# Altium PCB Olimex interface board.PcbDoc (part 2 of 2)
Units mm, origin at the board's own origin, x right, y up, seen from the top; angles counter-clockwise.
Board outline 96.01 x 73.71 mm, 4 copper layers (Component Side, Ground Plane, Power Plane, Solder Side), stack 0.98 mm thick; 92 components, 62 nets, 646 pads, 104 vias.
Unrouted connection lines stored in the file: 1.
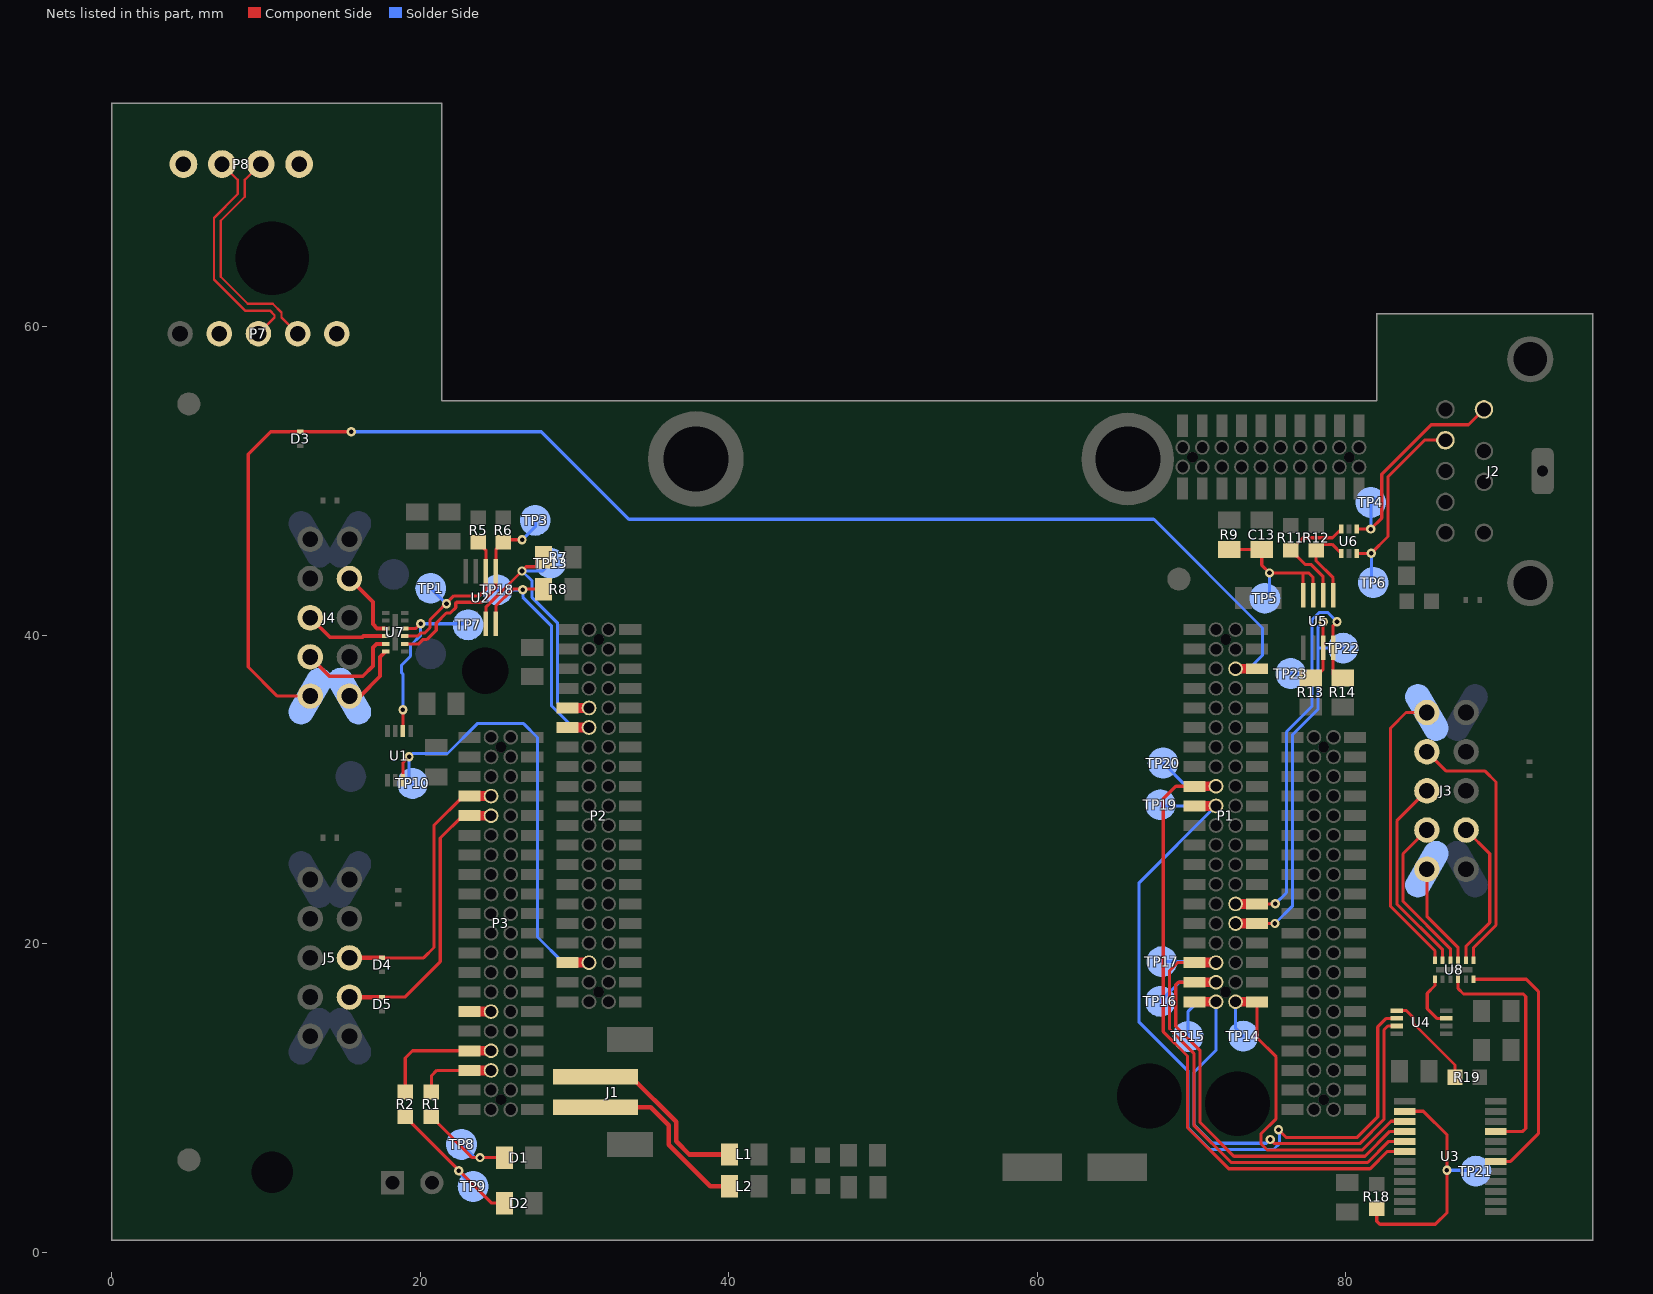
[diagram p4: the nets of this part, all layers, seen from the top]

## Via types
v1: diameter 0.6, hole 0.3, Component Side to Solder Side, 63 vias
v2: diameter 0.6, hole 0.3, Component Side to Solder Side, tented both sides, 38 vias
v3: diameter 1, hole 0.5, Component Side to Solder Side, tented both sides, 2 vias
v4: diameter 1, hole 0.5, Component Side to Solder Side, 1 vias

## Nets (pads, with @x,y where several pads share a name; then routed paths per layer and width w, separated by ;. In a path a pad name is that pad's centre, name@x,y a point inside that pad or via, vN(x,y) a via of type N, cw(c..) or ccw(c..) an arc to the next point about the centre after c; other vN are vias at no path point) (continued)
NetC13_2: C13.2 R9.1 TP5.1 U5.7 U5.8 | length 10.7
  Component Side w0.203: R9.1@72.45,45.575 C13.2@74.55,45.575 74.55,44.55 v2(75.05,44.05) 77.575,44.05 77.875,43.75 U5.7@77.875,42.6 ; U5.8@77.225,42.6 77.225,44.05
  Solder Side w0.203: TP5.1@75.05,42.7 v2(75.05,44.05)
NetD1_1: D1.1 R1.1 TP8.1 | length 7.4
  Component Side w0.203: R1.1@20.725,8.8 23.375,6.15 D1.1@25.45,6.15
  Solder Side w0.203: TP8.1@22.675,7 23.525,6.15 v2(23.875,6.15)
NetD2_1: D2.1 R2.1 TP9.1 | length 10.2
  Component Side w0.203: R2.1@19.025,8.8 24.625,3.2 D2.1@25.461,3.2
  Solder Side w0.203: v2(22.5,5.3) 22.5,5.2 TP9.1@23.425,4.275
NetJ1_1: J1.1 L1.2 | length 11.5
  Component Side w0.3: J1.1@31.35,11.4 33.662,11.4 36.6,8.462 36.6,7.2 37.45,6.35 L1.2@40.05,6.35
NetJ1_2: J1.2 L2.2 | length 11.2
  Component Side w0.3: J1.2@31.35,9.4 34.95,9.4 36.097,8.253 36.097,6.992 38.788,4.3 L2.2@39.688,4.3
NetJ3_1: J3.1 U8.12 | length 19
  Component Side w0.2: J3.1@85.25,35 83.9,35 82.9,34 82.9,22.425 85.775,19.55 U8.12@85.775,18.939
NetJ3_3: J3.3 U8.7 | length 17.5
  Component Side w0.2: J3.3@85.25,32.46 86.51,31.2 89.025,31.2 89.725,30.5 89.725,26.018 89.728,26.015 89.728,21.214 88.275,19.761 U8.7@88.275,18.939
NetJ3_5: J3.5 U8.11 | length 13
  Component Side w0.2: J3.5@85.25,29.92 83.303,27.973 83.303,22.592 86.275,19.62 U8.11@86.275,18.939
NetJ3_7: J3.7 U8.10 | length 10.4
  Component Side w0.2: J3.7@85.25,27.38 83.706,25.836 83.706,22.759 86.775,19.69 U8.10@86.775,18.939
NetJ3_8: J3.8 U8.8 | length 9.7
  Component Side w0.2: U8.8@87.775,18.939 87.775,19.831 89.325,21.381 89.325,25.845 J3.8@87.79,27.38
NetJ3_9: J3.9 U8.9 | length 6.7
  Component Side w0.2: J3.9@85.25,24.84 85.25,21.786 87.275,19.761 U8.9@87.275,18.939
NetJ4_1: J4.1 U7.12 | length 4.3
  Component Side w0.254: J4.1@15.408,36.064 16.114,36.064 17.4,37.35 17.4,38.589 U7.12@17.761,38.95
NetJ4_4: J4.4 U7.11 | length 7
  Component Side w0.254: J4.4@12.868,38.604 14.122,37.35 16.275,37.35 16.943,38.018 16.943,39.218 17.175,39.45 U7.11@17.761,39.45
NetJ4_6: J4.6 U7.10 | length 5.4
  Component Side w0.254: J4.6@12.868,41.144 14.137,39.875 16.25,39.875 16.325,39.95 U7.10@17.761,39.95
NetJ4_7: J4.7 U7.9 | length 4.5
  Component Side w0.254: J4.7@15.408,43.684 16.925,42.167 16.925,40.725 17.2,40.45 U7.9@17.761,40.45
NetR11_1: R11.1 U5.6 U6.6 | length 7.9
  Component Side w0.2: U5.6@78.525,42.6 78.525,43.805 77.73,44.6 77.35,44.6 R11.1@76.425,45.525 77.225,46.325 79.135,46.325 U6.6@79.7,46.89
NetR12_1: R12.1 U5.5 U6.1 | length 5.4
  Component Side w0.2: U5.5@79.175,42.6 79.175,43.725 78.075,44.825 R12.1@78.075,45.525 78.45,45.9 79.11,45.9 U6.1@79.7,45.31
NetR18_2: R18.2 TP21.1 U3.2 | length 16.1
  Component Side w0.203: R18.2@82,2.825 82,2.025 82.2,1.825 85.8,1.825 86.561,2.586 86.561,7.614 85.025,9.15 U3.2@83.825,9.15
  Solder Side w0.203: v1(86.55,5.325) 88.375,5.325 TP21.1@88.425,5.275
NetR19_2: R19.2 U4.5 | length 6.3
  Component Side w0.203: U4.5@83.3,15.675 83.925,15.675 84.35,15.25 84.35,14.875 87.075,12.15 R19.2@87.075,11.35
NRESET: U3.21 U8.4 | length 15.8
  Component Side w0.203: U8.4@87.275,17.711 87.275,17.099 87.624,16.75 91.5,16.75 91.662,16.588 91.662,8.037 91.476,7.85 U3.21@89.725,7.85
PH20: P3.33 R2.2 | length 6.6
  Component Side w0.203: R2.2@19.025,10.4 19.025,12.6 19.495,13.07 P3.33@23.193,13.07
PH21: P3.35 R1.2 | length 3.7
  Component Side w0.203: R1.2@20.725,10.4 20.725,11.45 21.075,11.8 P3.35@23.193,11.8
RESET3: P2.35 TP10.1 U1.7 | length 30.1
  Component Side w0.2: U1.7@18.875,30.6 18.875,31.725 v1(19.275,32.125)
  Solder Side w0.2: TP10.1@19.5,30.4 19.275,30.625 v1(19.275,32.125) 19.497,32.347 21.767,32.347 23.695,34.275 26.7,34.275 27.6,33.375 27.6,20.45 29.265,18.785 P2.35@30.94,18.785
RESET5: TP7.1 U1.2 U7.4 | length 11.7
  Component Side w0.203: U1.2@18.875,33.8 v1(18.875,35.175) ; U7.4@18.989,40.45 19.725,40.45 v1(20.025,40.75)
  Solder Side w0.203: v1(18.875,35.175) 18.875,37.495 18.795,37.574 18.795,38.076 19.37,38.651 19.37,39.34 20.025,39.995 v1(20.025,40.75) TP7.1@23.025,40.75
RX: U3.18 U8.6 | length 17.2
  Component Side w0.203: U8.6@88.275,17.711 91.688,17.711 92.475,16.924 92.475,7.7 90.675,5.9 U3.18@89.725,5.9
S_E1: D5.1 J5.3 P3.9 | length 17.5
  Component Side w0.203: D5.1@17.525,16.55 19,16.55 21.3,18.85 21.3,26.864 22.746,28.31 P3.9@23.3,28.31
  Component Side w0.3: J5.3@15.408,16.554 D5.1@17.525,16.554
S_E2: D4.1 J5.5 P3.7 | length 16.9
  Component Side w0.203: D4.1@17.525,19.1 17.531,19.094 20.219,19.094 20.894,19.769 20.894,27.694 22.78,29.58 P3.7@23.3,29.58
  Component Side w0.3: J5.5@15.408,19.094 D4.1@17.525,19.094
S_EC: D3.1 J4.2 P1.6 | length 94.5
  Component Side w0.203: J4.2@12.868,36.064 10.736,36.064 8.85,37.95 8.85,51.75 10.3,53.2 D3.1@12.225,53.2 v1(15.525,53.2) ; P1.6@74.374,37.835 P1.6@74.735,37.835
  Solder Side w0.2: 67.538,47.537 74.6,40.475 74.6,38.7 73.735,37.835 P1.6@72.85,37.835
  Solder Side w0.203: v1(15.525,53.2) 27.85,53.2 33.525,47.525 67.525,47.525
SCL2_3V: P1.32 R13.1 TP22.1 U5.3 | length 27.7
  Component Side w0.2: P1.32@74.247,21.325 v2(75.4,21.325) ; R13.1@77.725,37.25 77.975,37.25 78.525,37.8 U5.3@78.525,39.2 v2(78.525,40.875)
  Solder Side w0.2: v2(75.4,21.325) 76.55,22.475 76.55,33.575 78.203,35.228 78.203,39.175 ; v2(78.525,40.875) 78.203,40.553 78.203,39.175 ; TP22.1@79.825,39.175 78.203,39.175
SCL2_5: J2.3 TP4.1 U6.4 | length 15.2
  Component Side w0.2: U6.4@80.7,46.89 v2(81.615,46.89) 82.325,47.6 82.325,50.45 85.525,53.65 87.95,53.65 J2.3@88.95,54.65
  Solder Side w0.2: v2(81.615,46.89) TP4.1@81.615,48.615 TP4.1@81.875,48.875
SCL3: P2.9 R7.1 TP13.1 U2.3 | length 20.1
  Component Side w0.2: U2.3@24.25,40.75 24.25,41.828 v2(26.597,44.175) 26.872,44.45 27.75,44.45 28,44.7 R7.1@28,45.075
  Solder Side w0.2: TP13.1@28.45,44.675 27.95,44.175 v2(26.597,44.175) 27.253,43.519 27.253,42.7 27.25,42.697 27.25,42.447 28.905,40.793 28.905,35.618 29.227,35.295 P2.9@30.94,35.295
SCL5: R5.1 TP1.1 U2.6 U7.3 | length 11.5
  Component Side w0.203: U7.3@18.989,39.95 19.825,39.95 20.02,40.145 20.276,40.145 20.63,40.499 20.63,41.005 22.182,42.556 23.831,42.556 24.25,42.975 U2.6@24.25,44.15 24.25,45.525 R5.1@23.75,46.025
  Solder Side w0.203: TP1.1@20.675,43.05 21.675,42.05 v1(21.7,42.05)
SD_DET: P3.29
SDA2_3V: P1.30 R14.1 TP23.1 U5.4 | length 28.2
  Component Side w0.2: P1.30@74.247,22.595 v2(75.42,22.595) ; v2(79.425,40.875) 79.175,40.625 U5.4@79.175,39.2 79.175,37.475 79.4,37.25 R14.1@79.8,37.25
  Solder Side w0.2: v2(75.42,22.595) 76.147,23.322 76.147,33.742 77.8,35.395 77.8,37.525 ; TP23.1@76.425,37.525 77.8,37.525 ; v2(79.425,40.875) 78.822,41.478 78.275,41.478 77.8,41.003 77.8,37.525
SDA2_5: J2.4 TP6.1 U6.3 | length 12.8
  Component Side w0.2: U6.3@80.7,45.31 81.635,45.31 v2(81.65,45.325) 82.728,46.403 82.728,50.283 85.095,52.65 J2.4@86.45,52.65
  Solder Side w0.2: TP6.1@81.65,43.55 v2(81.65,45.325)
SDA3: P2.11 R8.1 TP18.1 U2.4 | length 17.7
  Component Side w0.203: U2.4@24.9,40.75 24.9,41.905 25.995,43 R8.1@28,43
  Solder Side w0.203: TP18.1@25,42.95 v2(26.65,42.95) 26.65,42.475 28.5,40.625 28.5,35.45 29.925,34.025 P2.11@30.94,34.025
SDA5: R6.1 TP3.1 U2.5 U7.2 | length 13.9
  Component Side w0.203: U7.2@18.989,39.45 19.9,39.45 20.189,39.739 20.444,39.739 21.036,40.331 21.036,40.786 21.695,41.445 21.951,41.445 22.305,41.799 22.305,42.105 22.35,42.15 24,42.15 24.9,43.05 U2.5@24.9,44.15 24.9,45.55 R6.1@25.375,46.025 25.55,46.2 v1(26.6,46.2)
  Solder Side w0.203: v1(26.6,46.2) 27.45,47.05 TP3.1@27.45,47.45
SPI1_CLK: P1.35 TP17.1 U3.5 | length 31.3
  Component Side w0.203: P1.35@70.29,18.785 P1.35@70.183,18.785 69.085,18.785 68.569,18.269 68.569,14.481 70.144,12.906 70.144,8.256 72.568,5.831 81.406,5.831 82.774,7.2 U3.5@83.825,7.2
  Solder Side w0.203: TP17.1@68.075,18.85 P1.35@71.515,18.85
SPI1_MISO: P1.39 TP15.1 U4.7 | length 32.7
  Component Side w0.203: v2(75.1,7.325) 75.374,7.051 80.901,7.051 82.475,8.625 82.475,14.425 82.725,14.675 U4.7@83.3,14.675
  Solder Side w0.203: TP15.1@69.775,14 69.775,15.625 70.395,16.245 P1.39@71.58,16.245 71.58,13.099 70.156,11.675 70.156,8.268 71.343,7.081 74.856,7.081 v2(75.1,7.325)
SPI1_MOSI: P1.37 TP16.1 U3.4 | length 29.8
  Component Side w0.203: P1.37@70.183,17.515 69.14,17.515 68.975,17.35 68.975,14.65 70.55,13.075 70.55,8.424 72.737,6.238 81.238,6.238 82.85,7.85 U3.4@83.825,7.85
  Solder Side w0.203: TP16.1@67.975,16.275 69.215,17.515 P1.37@71.58,17.515
SPI1_NRESET: P1.40 TP14.1 U3.3 | length 22.8
  Component Side w0.203: P1.40@74.247,16.245 74.247,13.903 75.475,12.675 75.475,8.675 74.495,7.695 74.495,7.055 74.906,6.644 81.069,6.644 82.925,8.5 U3.3@83.825,8.5
  Solder Side w0.203: P1.40@72.85,16.245 72.85,14.525 TP14.1@73.35,14.025
TX: U4.3 U8.1 | length 3.6
  Component Side w0.203: U8.1@85.775,17.711 85.775,17.3 85.27,16.795 85.27,15.805 85.9,15.175 U4.3@86.5,15.175
UART_RX: P1.19 TP19.1 U4.6 | length 49.8
  Component Side w0.203: v2(75.629,7.95) 76.122,7.457 80.733,7.457 82.069,8.793 82.069,14.619 82.625,15.175 U4.6@83.3,15.175
  Solder Side w0.203: TP19.1@68.055,28.945 P1.19@71.58,28.945 66.6,23.965 66.6,14.925 69.75,11.775 69.75,8.1 71.175,6.675 75.305,6.675 75.705,7.074 75.705,7.874 v2(75.629,7.95) v2@75.629,7.946
UART_TX: P1.17 TP20.1 U3.6 | length 44.1
  Component Side w0.203: P1.17@70.29,30.215 P1.17@70.183,30.215 68.978,30.215 68.162,29.399 68.162,14.313 69.737,12.738 69.737,8.088 72.4,5.425 81.574,5.425 82.699,6.55 U3.6@83.825,6.55
  Solder Side w0.203: TP20.1@68.15,31.725 69.66,30.215 P1.17@71.58,30.215
USB_5V: P7.4 P8.1
USB_DATA_N: P7.3 P8.2 | length 15.1
  Component Side w0.15: P8.2@7.15,70.55 8.175,69.525 8.175,68.611 6.625,67.061 6.625,63.064 8.639,61.05 10.257,61.05 10.557,60.75 10.557,60.601 P7.3@9.512,59.556
USB_DATA_P: P7.2 P8.3 | length 15.1
  Component Side w0.15: P8.3@9.65,70.55 8.625,69.525 8.625,68.425 7.075,66.875 7.075,63.25 8.825,61.5 10.443,61.5 11.007,60.936 11.007,60.601 P7.2@12.052,59.556
USB_GND: P7.1 P8.4
pads on no net: Fid1. Fid2. Fid3. J2.6 J2.7 J2.8 J2.9 J5.1 P1.0 P1.5 P1.7 P1.8 P1.9 P1.10 P1.11 P1.12 P1.13 P1.14 P1.15 P1.20 P1.21 P1.22 P1.23 P1.24 P1.25 P1.26 P1.27 P1.28 P1.29 P1.31 P1.33 P1.34 P1.36 P1.38 P2.0 P2.4 P2.5 P2.6 P2.7 P2.8 P2.10 P2.12 P2.13 P2.14 P2.16 P2.17 P2.18 P2.19 P2.20 P2.21 P2.22 P2.23 P2.24 P2.25 P2.26 P2.27 P2.28 P2.29 P2.30 P2.31 P2.32 P2.33 P2.34 P2.36 P2.37 P2.38 P2.39 P2.40 P3.0 P3.4 P3.5 P3.6 P3.8 P3.10 P3.11 P3.12 P3.13 P3.14 P3.15 P3.16 P3.17 P3.18 P3.19 P3.20 P3.21 P3.22 P3.23 P3.24 P3.25 P3.26 P3.27 P3.28 P3.30 P3.31 P3.32 P3.34 P3.36 P3.37 P3.38 P3.39 P3.40 P5.0 P5.5 P5.6 P5.7 P5.8 P5.9 P5.10 P5.11 P5.12 P5.13 P5.14 P5.15 P5.16 P5.17 P5.18 P5.19 P5.20 P5.21 P5.22 P5.23 P5.24 P5.25 P5.26 P5.27 P5.28 P5.29 P5.30 P5.31 P5.32 P5.33 P5.34 P5.35 P5.36 P5.37 P5.38 P5.39 P5.40 P6.0 P6.3 P6.4 P6.5 P6.6 P6.7 P6.8 P6.9 P6.10 P6.11 P6.12 P6.13 P6.14 P6.15 P6.16 P6.17 P6.18 P6.19 P6.20 P7.5 SP2.0 SP3.0

## Polygon pours and split planes (outlines as drawn)
no net on Mechanical 13 "Mechanical 1-No Net" (none, pour order 13): 682 vertices, not listed, extent 37.434,9.148 67.083,46.663
USB_GND on Component Side "USB_GND" (solid, remove dead copper, pour order 11): 0,74.5 21.4,74.5 21.4,55.193 0,55.2
GND on Component Side "GND" (solid, remove dead copper, pour order 21): 0,0.795 -0.004,55.194 21.405,55.2 81.995,55.2 81.995,60.85 96,60.855 96.005,0.8
USB_GND on Solder Side "USB_GND" (solid, remove dead copper, pour order 12): 0,74.5 21.4,74.5 21.4,55.192 0,55.2
GND on Solder Side "GND" (solid, remove dead copper, pour order 22): 0,0.795 -0.004,55.194 21.405,55.2 81.995,55.2 81.995,60.85 96,60.855 96.005,0.8
USB_GND on Ground Plane (split plane): 20.895,73.99 20.895,55.324 0.509,55.324 0.51,73.995
GND on Ground Plane (split plane): 95.495,60.34 95.49,1.305 0.505,1.31 0.509,55.065 20.915,55.065 20.934,55.004 20.981,54.916 21.044,54.839 21.122,54.775 21.21,54.728 21.306,54.699 21.405,54.689 81.995,54.689 82.044,54.694 82.094,54.699 82.143,54.714 82.19,54.728 82.234,54.752 82.278,54.775 82.317,54.807 82.355,54.838 82.355,54.839 82.356,54.839 82.387,54.877 82.419,54.916 82.442,54.959 82.466,55.004 82.48,55.051 82.495,55.1 82.5,55.149 82.505,55.199 82.51,60.345
USB_5V on Power Plane (split plane): 20.895,73.99 20.895,55.324 0.509,55.324 0.51,73.995
+3.3V on Power Plane (split plane): 969 vertices, not listed, extent 11.604,3.979 86.221,51.646
+5V on Power Plane (split plane): 95.495,60.34 95.49,1.305 0.505,1.31 0.509,55.065 20.915,55.065 20.934,55.004 20.981,54.916 21.044,54.839 21.122,54.775 21.21,54.728 21.306,54.699 21.405,54.689 81.995,54.689 82.044,54.694 82.094,54.699 82.143,54.714 82.19,54.728 82.234,54.752 82.278,54.775 82.317,54.807 82.355,54.838 82.355,54.839 82.356,54.839 82.387,54.877 82.419,54.916 82.442,54.959 82.466,55.004 82.48,55.051 82.495,55.1 82.5,55.149 82.505,55.199 82.51,60.345

## Keep-outs
Keep-Out Layer:
  lines w0.01: 64.25,10.173 cw(c63.776,10.329) 64.234,10.131 64.217,10.095 64.199,10.063 64.179,10.031 64.158,10.001 64.135,9.972 64.11,9.943 64.084,9.914 64.065,9.895 64.043,9.864 64.017,9.833 cw(c63.659,10.153) 63.983,9.799 cw(c63.691,10.117) 63.915,9.747 cw(c63.699,10.105) 63.833,9.709 63.804,9.691 63.773,9.674 63.74,9.658 63.704,9.643 cw(c63.541,10.095) 63.66,9.63 cw(c63.552,10.051) 63.592,9.618 cw(c63.555,10.028) 63.555,9.617 58.76,9.318 57.204,9.246 51.099,9.153 cw(c50.852,234.81) 50.852,9.153 44.501,9.292 41.318,9.463 38.327,9.693 38.15,9.709 cw(c38.151,10.548) 38.003,9.722 cw(c38.168,10.646) 37.91,9.744 37.872,9.756 cw(c38.35,10.469) 37.754,9.851 cw(c38.338,10.454) 37.64,9.987 37.599,10.053 37.561,10.122 37.526,10.198 37.501,10.266 37.48,10.311 cw(c38.034,10.536) 37.462,10.363 cw(c37.98,10.52) 37.445,10.438 cw(c37.944,10.514) 37.454,10.637 37.547,44.943 37.548,44.99 37.55,45.039 37.554,45.09 37.559,45.142 37.566,45.197 37.574,45.254 37.585,45.314 37.593,45.36 cw(c38.26,45.194) 37.779,45.684 cw(c38.51,45.192) 37.853,45.779 cw(c38.463,45.234) 38.011,45.916 38.07,45.954 38.132,45.989 38.199,46.021 38.275,46.051 38.289,46.055 45.196,46.519 52.058,46.658 58.965,46.565 65.826,46.148 cw(c65.501,45.167) 65.937,46.104 66.024,46.059 66.101,46.011 66.104,46.009 cw(c66.142,45.844) 66.121,46.012 cw(c66.14,45.86) 66.143,46.013 cw(c66.139,45.868) 66.206,45.997 cw(c66.128,45.844) 66.221,45.988 66.233,45.98 66.243,45.971 66.253,45.962 66.263,45.953 66.272,45.943 66.28,45.932 66.289,45.921 66.297,45.909 66.305,45.896 66.314,45.883 66.322,45.869 66.33,45.853 66.339,45.836 66.347,45.818 66.355,45.799 66.363,45.778 66.372,45.756 66.38,45.733 66.388,45.708 66.397,45.681 66.405,45.653 66.413,45.622 66.421,45.59 66.43,45.555 66.438,45.518 66.446,45.478 66.455,45.434 66.463,45.388 66.472,45.338 66.48,45.286 66.488,45.23 66.496,45.169 66.504,45.102 66.511,45.034 66.519,44.959 66.526,44.879 66.533,44.792 66.539,44.699 66.546,44.599 66.551,44.492 66.557,44.377 66.561,44.254 66.566,44.122 66.568,44.015 67.078,35.856 ccw(c78.349,28.553) 66.186,34.249 66.012,33.863 ccw(c90.423,23.261) 65.177,31.684 65.031,31.169 64.904,30.677 64.795,30.203 64.702,29.744 64.626,29.301 64.565,28.869 64.528,28.531 64.482,28.3 64.472,28.183 64.461,28.049 64.449,27.891 64.433,27.702 64.415,27.473 64.393,27.191 64.389,27.141 64.371,26.929 64.357,26.698 64.347,26.442 64.343,26.16 64.343,26.121 64.343,25.796 64.351,25.458 64.38,25.09 64.389,25.008 64.389,24.776 64.435,24.174 64.435,23.942 64.45,23.909 cw(c64.061,23.746) 64.466,23.865 cw(c64.096,23.756) 64.482,23.756 ccw(c80.208,25.375) 65.919,18.61 65.82,18.107 65.73,17.649 65.643,17.206 65.561,16.79 65.485,16.401 65.413,16.038 65.344,15.686 65.279,15.357 65.219,15.051 65.16,14.755 65.106,14.479 65.056,14.224 65.007,13.976 64.962,13.747 64.918,13.525 64.877,13.32 64.838,13.122 64.802,12.939 64.769,12.771 64.737,12.609 64.708,12.461 64.679,12.317 64.653,12.186 64.628,12.059 64.605,11.943 64.583,11.832 64.563,11.731 64.544,11.633 64.525,11.538 64.508,11.453 64.492,11.371 64.477,11.297 64.463,11.226 64.449,11.157 64.437,11.096 64.425,11.037 64.414,10.979 64.404,10.929 64.394,10.88 64.385,10.833 64.376,10.792 64.369,10.753 64.361,10.714 64.353,10.677 64.347,10.645 64.341,10.614 64.335,10.584 64.329,10.556 64.324,10.531 64.319,10.508 64.315,10.485 64.31,10.463 64.307,10.445 64.303,10.427 64.3,10.41 64.296,10.394 64.293,10.378 64.29,10.363 64.287,10.35 64.285,10.338 64.283,10.327 64.28,10.316 64.278,10.305 64.276,10.295 64.274,10.287 64.273,10.279 64.271,10.272 64.27,10.265 64.268,10.258 64.267,10.251 64.266,10.245 64.264,10.239 64.263,10.234 64.263,10.23 64.262,10.226 64.261,10.222 64.26,10.218 64.259,10.214 64.258,10.211 64.258,10.207 64.257,10.204 64.256,10.201 64.256,10.199 64.256,10.197 64.255,10.195 64.255,10.193 64.254,10.191 64.254,10.19 64.254,10.188 64.253,10.187 64.253,10.185 64.253,10.184 64.252,10.182 64.252,10.181 64.252,10.18 64.251,10.179 64.251,10.178 ; 64.25,10.173 64.25,10.174 ; 64.25,10.173 64.25,10.173 ; 64.25,10.175 64.251,10.175 ; 64.25,10.174 64.25,10.175 ; 64.25,10.174 64.25,10.174 ; 64.251,10.176 64.251,10.177 ; 64.251,10.176 64.251,10.176 ; 64.251,10.175 64.251,10.176 ; 64.251,10.177 64.251,10.178 ; 0,0.8 0,74.5 21.4,74.5 21.4,55.194 82,55.194 82,60.85 96,60.85 96,0.8 0,0.8
Board Outline:
  lines w0.01: 82,55.194 21.4,55.194 21.4,74.5 0,74.5 0,0.8 96,0.8 96,60.85 ; 37.445,10.438 ccw(c37.98,10.52) 37.462,10.363 ; 37.445,10.438 cw(c37.944,10.514) 37.454,10.637 ; 37.445,10.438 ccw(c37.98,10.52) 37.462,10.363 ; 37.445,10.438 cw(c37.944,10.514) 37.454,10.637 ; 37.454,10.637 37.547,44.943 ; 37.454,10.637 37.547,44.943 ; 37.462,10.363 ccw(c38.034,10.536) 37.48,10.311 ; 37.462,10.363 ccw(c38.034,10.536) 37.48,10.311 ; 37.48,10.311 37.501,10.266 ; 37.48,10.311 37.501,10.266 ; 37.501,10.266 37.526,10.198 ; 37.501,10.266 37.526,10.198 ; 37.526,10.198 37.561,10.122 ; 37.526,10.198 37.561,10.122 ; 37.547,44.943 37.548,44.99 ; 37.547,44.943 37.548,44.99 ; 37.548,44.99 37.55,45.039 ; 37.548,44.99 37.55,45.039 ; 37.55,45.039 37.554,45.09 ; 37.55,45.039 37.554,45.09 ; 37.554,45.09 37.559,45.142 ; 37.554,45.09 37.559,45.142 ; 37.559,45.142 37.566,45.197 ; 37.559,45.142 37.566,45.197 ; 37.561,10.122 37.599,10.053 ; 37.561,10.122 37.599,10.053 ; 37.566,45.197 37.574,45.254 ; 37.566,45.197 37.574,45.254 ; 37.574,45.254 37.585,45.314 ; 37.574,45.254 37.585,45.314 ; 37.585,45.314 37.593,45.36 ; 37.585,45.314 37.593,45.36 ; 37.593,45.36 cw(c38.26,45.194) 37.779,45.684 ; 37.593,45.36 cw(c38.26,45.194) 37.779,45.684 ; 37.599,10.053 37.64,9.987 ; 37.599,10.053 37.64,9.987 ; 37.64,9.987 ccw(c38.338,10.454) 37.754,9.851 ; 37.64,9.987 ccw(c38.338,10.454) 37.754,9.851 ; 37.754,9.851 ccw(c38.35,10.469) 37.872,9.756 ; 37.754,9.851 ccw(c38.35,10.469) 37.872,9.756 ; 37.779,45.684 cw(c38.51,45.192) 37.853,45.779 ; 37.779,45.684 cw(c38.51,45.192) 37.853,45.779 ; 37.853,45.779 cw(c38.463,45.234) 38.011,45.916 ; 37.853,45.779 cw(c38.463,45.234) 38.011,45.916 ; 37.872,9.756 37.91,9.744 ; 37.872,9.756 37.91,9.744 ; 37.91,9.744 ccw(c38.168,10.646) 38.003,9.722 ; 37.91,9.744 ccw(c38.168,10.646) 38.003,9.722 ; 38.003,9.722 ccw(c38.151,10.548) 38.15,9.709 ; 38.003,9.722 ccw(c38.151,10.548) 38.15,9.709 ; 38.011,45.916 38.07,45.954 ; 38.011,45.916 38.07,45.954 ; 38.07,45.954 38.132,45.989 ; 38.07,45.954 38.132,45.989 ; 38.132,45.989 38.199,46.021 ; 38.132,45.989 38.199,46.021 ; 38.15,9.709 38.327,9.693 ; 38.15,9.709 38.327,9.693 ; 38.199,46.021 38.275,46.051 ; 38.199,46.021 38.275,46.051 ; 38.275,46.051 38.289,46.055 ; 38.275,46.051 38.289,46.055 ; 38.289,46.055 45.196,46.519 ; 38.289,46.055 45.196,46.519 ; 38.327,9.693 41.318,9.463 ; 38.327,9.693 41.318,9.463 ; 41.318,9.463 44.501,9.292 ; 41.318,9.463 44.501,9.292 ; 44.501,9.292 50.852,9.153 ; 44.501,9.292 50.852,9.153 ; 45.196,46.519 52.058,46.658 ; 45.196,46.519 52.058,46.658 ; 50.852,9.153 ccw(c50.852,234.81) 51.099,9.153 ; 50.852,9.153 ccw(c50.852,234.81) 51.099,9.153 ; 51.099,9.153 57.204,9.246 ; 51.099,9.153 57.204,9.246 ; 52.058,46.658 58.965,46.565 ; 52.058,46.658 58.965,46.565 ; 57.204,9.246 58.76,9.318 ; 57.204,9.246 58.76,9.318 ; 58.76,9.318 63.555,9.617 ; 58.76,9.318 63.555,9.617 ; 58.965,46.565 65.826,46.148 ; 58.965,46.565 65.826,46.148 ; 63.555,9.617 ccw(c63.555,10.028) 63.592,9.618 ; 63.555,9.617 ccw(c63.555,10.028) 63.592,9.618 ; 63.592,9.618 ccw(c63.552,10.051) 63.66,9.63 ; 63.592,9.618 ccw(c63.552,10.051) 63.66,9.63 ; 63.66,9.63 ccw(c63.541,10.095) 63.704,9.643 ; 63.66,9.63 ccw(c63.541,10.095) 63.704,9.643 ; 63.704,9.643 63.74,9.658 ; 63.704,9.643 63.74,9.658 ; 63.74,9.658 63.773,9.674 ; 63.74,9.658 63.773,9.674 ; 63.773,9.674 63.804,9.691 ; 63.773,9.674 63.804,9.691 ; 63.804,9.691 63.833,9.709 ; 63.804,9.691 63.833,9.709 ; 63.833,9.709 ccw(c63.699,10.105) 63.915,9.747 ; 63.833,9.709 ccw(c63.699,10.105) 63.915,9.747 ; 63.915,9.747 ccw(c63.691,10.117) 63.983,9.799 ; 63.915,9.747 ccw(c63.691,10.117) 63.983,9.799 ; 63.983,9.799 ccw(c63.659,10.153) 64.017,9.833 ; 63.983,9.799 ccw(c63.659,10.153) 64.017,9.833 ; 64.017,9.833 64.043,9.864 ; 64.017,9.833 64.043,9.864 ; 64.043,9.864 64.065,9.895 ; 64.043,9.864 64.065,9.895 ; 64.065,9.895 64.084,9.914 ; 64.065,9.895 64.084,9.914 ; 64.084,9.914 64.11,9.943 ; 64.084,9.914 64.11,9.943 ; 64.11,9.943 64.135,9.972 ; 64.11,9.943 64.135,9.972 ; 64.135,9.972 64.158,10.001 ; 64.135,9.972 64.158,10.001 ; 64.158,10.001 64.179,10.031 ; 64.158,10.001 64.179,10.031 ; 64.179,10.031 64.199,10.063 ; 64.179,10.031 64.199,10.063 ; 64.199,10.063 64.217,10.095 ; 64.199,10.063 64.217,10.095 ; 64.217,10.095 64.234,10.131 ; 64.217,10.095 64.234,10.131 ; 64.234,10.131 ccw(c63.776,10.329) 64.25,10.173 ; 64.234,10.131 ccw(c63.776,10.329) 64.25,10.173 ; 64.25,10.173 64.25,10.174 ; 64.25,10.173 64.25,10.173 ; 64.25,10.173 64.25,10.174 ; 64.25,10.173 64.25,10.173 ; 64.25,10.175 64.251,10.175 ; 64.25,10.174 64.25,10.175 ; 64.25,10.174 64.25,10.174 ; 64.25,10.175 64.251,10.175 ; 64.25,10.174 64.25,10.175 ; 64.25,10.174 64.25,10.174 ; 64.251,10.176 64.251,10.177 ; 64.251,10.176 64.251,10.176 ; 64.251,10.175 64.251,10.176 ; 64.251,10.176 64.251,10.177 ; 64.251,10.176 64.251,10.176 ; 64.251,10.175 64.251,10.176 ; 64.251,10.178 64.251,10.179 ; 64.251,10.177 64.251,10.178 ; 64.251,10.178 64.251,10.179 ; 64.251,10.177 64.251,10.178 ; 64.251,10.179 64.252,10.18 ; 64.251,10.179 64.252,10.18 ; 64.252,10.18 64.252,10.181 ; 64.252,10.18 64.252,10.181 ; 64.252,10.181 64.252,10.182 ; 64.252,10.181 64.252,10.182 ; 64.252,10.182 64.253,10.184 ; 64.252,10.182 64.253,10.184 ; 64.253,10.184 64.253,10.185 ; 64.253,10.184 64.253,10.185 ; 64.253,10.185 64.253,10.187 ; 64.253,10.185 64.253,10.187 ; 64.253,10.187 64.254,10.188 ; 64.253,10.187 64.254,10.188 ; 64.254,10.188 64.254,10.19 ; 64.254,10.188 64.254,10.19 ; 64.254,10.19 64.254,10.191 ; 64.254,10.19 64.254,10.191 ; 64.254,10.191 64.255,10.193 ; 64.254,10.191 64.255,10.193 ; 64.255,10.193 64.255,10.195 ; 64.255,10.193 64.255,10.195 ; 64.255,10.195 64.256,10.197 ; 64.255,10.195 64.256,10.197 ; 64.256,10.197 64.256,10.199 ; 64.256,10.197 64.256,10.199 ; 64.256,10.199 64.256,10.201 ; 64.256,10.199 64.256,10.201 ; 64.256,10.201 64.257,10.204 ; 64.256,10.201 64.257,10.204 ; 64.257,10.204 64.258,10.207 ; 64.257,10.204 64.258,10.207 ; 64.258,10.207 64.258,10.211 ; 64.258,10.207 64.258,10.211 ; 64.258,10.211 64.259,10.214 ; 64.258,10.211 64.259,10.214 ; 64.259,10.214 64.26,10.218 ; 64.259,10.214 64.26,10.218 ; 64.26,10.218 64.261,10.222 ; 64.26,10.218 64.261,10.222 ; 64.261,10.222 64.262,10.226 ; 64.261,10.222 64.262,10.226 ; 64.262,10.226 64.263,10.23 ; 64.262,10.226 64.263,10.23 ; 64.263,10.23 64.263,10.234 ; 64.263,10.23 64.263,10.234 ; 64.263,10.234 64.264,10.239 ; 64.263,10.234 64.264,10.239 ; 64.264,10.239 64.266,10.245 ; 64.264,10.239 64.266,10.245 ; 64.266,10.245 64.267,10.251 ; 64.266,10.245 64.267,10.251 ; 64.267,10.251 64.268,10.258 ; 64.267,10.251 64.268,10.258 ; 64.268,10.258 64.27,10.265 ; 64.268,10.258 64.27,10.265 ; 64.27,10.265 64.271,10.272 ; 64.27,10.265 64.271,10.272 ; 64.271,10.272 64.273,10.279 ; 64.271,10.272 64.273,10.279 ; 64.273,10.279 64.274,10.287 ; 64.273,10.279 64.274,10.287 ; 64.274,10.287 64.276,10.295 ; 64.274,10.287 64.276,10.295 ; 64.276,10.295 64.278,10.305 ; 64.276,10.295 64.278,10.305 ; 64.278,10.305 64.28,10.316 ; 64.278,10.305 64.28,10.316 ; 64.28,10.316 64.283,10.327 ; 64.28,10.316 64.283,10.327 ; 64.283,10.327 64.285,10.338 ; 64.283,10.327 64.285,10.338 ; 64.285,10.338 64.287,10.35 ; 64.285,10.338 64.287,10.35 ; 64.287,10.35 64.29,10.363 ; 64.287,10.35 64.29,10.363 ; 64.29,10.363 64.293,10.378 ; 64.29,10.363 64.293,10.378 ; 64.293,10.378 64.296,10.394 ; 64.293,10.378 64.296,10.394 ; 64.296,10.394 64.3,10.41 ; 64.296,10.394 64.3,10.41 ; 64.3,10.41 64.303,10.427 ; 64.3,10.41 64.303,10.427 ; 64.303,10.427 64.307,10.445 ; 64.303,10.427 64.307,10.445 ; 64.307,10.445 64.31,10.463 ; 64.307,10.445 64.31,10.463 ; 64.31,10.463 64.315,10.485 ; 64.31,10.463 64.315,10.485 ; 64.315,10.485 64.319,10.508 ; 64.315,10.485 64.319,10.508 ; 64.319,10.508 64.324,10.531 ; 64.319,10.508 64.324,10.531 ; 64.324,10.531 64.329,10.556 ; 64.324,10.531 64.329,10.556 ; 64.329,10.556 64.335,10.584 ; 64.329,10.556 64.335,10.584 ; 64.335,10.584 64.341,10.614 ; 64.335,10.584 64.341,10.614 ; 64.341,10.614 64.347,10.645 ; 64.341,10.614 64.347,10.645 ; 64.343,25.796 64.343,26.121 ; 64.343,25.796 64.351,25.458 ; 64.343,25.796 64.343,26.121 ; 64.343,25.796 64.351,25.458 ; 64.343,26.121 64.343,26.16 ; 64.343,26.121 64.343,26.16 ; 64.343,26.16 64.347,26.442 ; 64.343,26.16 64.347,26.442 ; 64.347,10.645 64.353,10.677 ; 64.347,10.645 64.353,10.677 ; 64.347,26.442 64.357,26.698 ; 64.347,26.442 64.357,26.698 ; 64.351,25.458 64.38,25.09 ; 64.351,25.458 64.38,25.09 ; 64.353,10.677 64.361,10.714 ; 64.353,10.677 64.361,10.714 ; 64.357,26.698 64.371,26.929 ; 64.357,26.698 64.371,26.929 ; 64.361,10.714 64.369,10.753 ; 64.361,10.714 64.369,10.753 ; 64.369,10.753 64.376,10.792 ; 64.369,10.753 64.376,10.792 ; 64.371,26.929 64.389,27.141 ; 64.371,26.929 64.389,27.141 ; 64.376,10.792 64.385,10.833 ; 64.376,10.792 64.385,10.833 ; 64.38,25.09 64.389,25.008 ; 64.38,25.09 64.389,25.008 ; 64.385,10.833 64.394,10.88 ; 64.385,10.833 64.394,10.88 ; 64.389,24.776 64.389,25.008 ; 64.389,24.776 64.435,24.174 ; 64.389,24.776 64.389,25.008 ; 64.389,24.776 64.435,24.174 ; 64.389,27.141 64.393,27.191 ; 64.389,27.141 64.393,27.191 ; 64.393,27.191 64.415,27.473 ; 64.393,27.191 64.415,27.473 ; 64.394,10.88 64.404,10.929 ; 64.394,10.88 64.404,10.929 ; 64.404,10.929 64.414,10.979 ; 64.404,10.929 64.414,10.979 ; 64.414,10.979 64.425,11.037 ; 64.414,10.979 64.425,11.037 ; 64.415,27.473 64.433,27.702 ; 64.415,27.473 64.433,27.702 ; 64.425,11.037 64.437,11.096 ; 64.425,11.037 64.437,11.096 ; 64.433,27.702 64.449,27.891 ; 64.433,27.702 64.449,27.891 ; 64.435,23.942 64.435,24.174 ; 64.435,23.942 64.45,23.909 ; 64.435,23.942 64.435,24.174 ; 64.435,23.942 64.45,23.909 ; 64.437,11.096 64.449,11.157 ; 64.437,11.096 64.449,11.157 ; 64.449,11.157 64.463,11.226 ; 64.449,11.157 64.463,11.226 ; 64.449,27.891 64.461,28.049 ; 64.449,27.891 64.461,28.049 ; 64.45,23.909 cw(c64.061,23.746) 64.466,23.865 ; 64.45,23.909 cw(c64.061,23.746) 64.466,23.865 ; 64.461,28.049 64.472,28.183 ; 64.461,28.049 64.472,28.183 ; 64.463,11.226 64.477,11.297 ; 64.463,11.226 64.477,11.297 ; 64.466,23.865 cw(c64.096,23.756) 64.482,23.756 ; 64.466,23.865 cw(c64.096,23.756) 64.482,23.756 ; 64.472,28.183 64.482,28.3 ; 64.472,28.183 64.482,28.3 ; 64.477,11.297 64.492,11.371 ; 64.477,11.297 64.492,11.371 ; 64.482,23.756 ccw(c80.208,25.375) 65.919,18.61 ; 64.482,23.756 ccw(c80.208,25.375) 65.919,18.61 ; 64.482,28.3 64.528,28.531 ; 64.482,28.3 64.528,28.531 ; 64.492,11.371 64.508,11.453 ; 64.492,11.371 64.508,11.453 ; 64.508,11.453 64.525,11.538 ; 64.508,11.453 64.525,11.538 ; 64.525,11.538 64.544,11.633 ; 64.525,11.538 64.544,11.633 ; 64.528,28.531 64.565,28.869 ; 64.528,28.531 64.565,28.869 ; 64.544,11.633 64.563,11.731 ; 64.544,11.633 64.563,11.731 ; 64.563,11.731 64.583,11.832 ; 64.563,11.731 64.583,11.832 ; 64.565,28.869 64.626,29.301 ; 64.565,28.869 64.626,29.301 ; 64.583,11.832 64.605,11.943 ; 64.583,11.832 64.605,11.943 ; 64.605,11.943 64.628,12.059 ; 64.605,11.943 64.628,12.059 ; 64.626,29.301 64.702,29.744 ; 64.626,29.301 64.702,29.744 ; 64.628,12.059 64.653,12.186 ; 64.628,12.059 64.653,12.186 ; 64.653,12.186 64.679,12.317 ; 64.653,12.186 64.679,12.317 ; 64.679,12.317 64.708,12.461 ; 64.679,12.317 64.708,12.461 ; 64.702,29.744 64.795,30.203 ; 64.702,29.744 64.795,30.203 ; 64.708,12.461 64.737,12.609 ; 64.708,12.461 64.737,12.609 ; 64.737,12.609 64.769,12.771 ; 64.737,12.609 64.769,12.771 ; 64.769,12.771 64.802,12.939 ; 64.769,12.771 64.802,12.939 ; 64.795,30.203 64.904,30.677 ; 64.795,30.203 64.904,30.677 ; 64.802,12.939 64.838,13.122 ; 64.802,12.939 64.838,13.122 ; 64.838,13.122 64.877,13.32 ; 64.838,13.122 64.877,13.32 ; 64.877,13.32 64.918,13.525 ; 64.877,13.32 64.918,13.525 ; 64.904,30.677 65.031,31.169 ; 64.904,30.677 65.031,31.169 ; 64.918,13.525 64.962,13.747 ; 64.918,13.525 64.962,13.747 ; 64.962,13.747 65.007,13.976 ; 64.962,13.747 65.007,13.976 ; 65.007,13.976 65.056,14.224 ; 65.007,13.976 65.056,14.224 ; 65.031,31.169 65.177,31.684 ; 65.031,31.169 65.177,31.684 ; 65.056,14.224 65.106,14.479 ; 65.056,14.224 65.106,14.479 ; 65.106,14.479 65.16,14.755 ; 65.106,14.479 65.16,14.755 ; 65.16,14.755 65.219,15.051 ; 65.16,14.755 65.219,15.051 ; 65.177,31.684 cw(c90.423,23.261) 66.012,33.863 ; 65.177,31.684 cw(c90.423,23.261) 66.012,33.863 ; 65.219,15.051 65.279,15.357 ; 65.219,15.051 65.279,15.357 ; 65.279,15.357 65.344,15.686 ; 65.279,15.357 65.344,15.686 ; 65.344,15.686 65.413,16.038 ; 65.344,15.686 65.413,16.038 ; 65.413,16.038 65.485,16.401 ; 65.413,16.038 65.485,16.401 ; 65.485,16.401 65.561,16.79 ; 65.485,16.401 65.561,16.79 ; 65.561,16.79 65.643,17.206 ; 65.561,16.79 65.643,17.206 ; 65.643,17.206 65.73,17.649 ; 65.643,17.206 65.73,17.649 ; 65.73,17.649 65.82,18.107 ; 65.73,17.649 65.82,18.107 ; 65.82,18.107 65.919,18.61 ; 65.82,18.107 65.919,18.61 ; 65.826,46.148 cw(c65.501,45.167) 65.937,46.104 ; 65.826,46.148 cw(c65.501,45.167) 65.937,46.104 ; 65.937,46.104 66.024,46.059 ; 65.937,46.104 66.024,46.059 ; 66.012,33.863 66.186,34.249 ; 66.012,33.863 66.186,34.249 ; 66.024,46.059 66.101,46.011 ; 66.024,46.059 66.101,46.011 ; 66.101,46.011 66.104,46.009 ; 66.101,46.011 66.104,46.009 ; 66.104,46.009 cw(c66.142,45.844) 66.121,46.012 ; 66.104,46.009 cw(c66.142,45.844) 66.121,46.012 ; 66.121,46.012 cw(c66.14,45.86) 66.143,46.013 ; 66.121,46.012 cw(c66.14,45.86) 66.143,46.013 ; 66.143,46.013 cw(c66.139,45.868) 66.206,45.997 ; 66.143,46.013 cw(c66.139,45.868) 66.206,45.997 ; 66.186,34.249 cw(c78.349,28.553) 67.078,35.856 ; 66.186,34.249 cw(c78.349,28.553) 67.078,35.856 ; 66.206,45.997 cw(c66.128,45.844) 66.221,45.988 ; 66.206,45.997 cw(c66.128,45.844) 66.221,45.988 ; 66.221,45.988 66.233,45.98 ; 66.221,45.988 66.233,45.98 ; 66.233,45.98 66.243,45.971 ; 66.233,45.98 66.243,45.971 ; 66.243,45.971 66.253,45.962 ; 66.243,45.971 66.253,45.962 ; 66.253,45.962 66.263,45.953 ; 66.253,45.962 66.263,45.953 ; 66.263,45.953 66.272,45.943 ; 66.263,45.953 66.272,45.943 ; 66.272,45.943 66.28,45.932 ; 66.272,45.943 66.28,45.932 ; 66.28,45.932 66.289,45.921 ; 66.28,45.932 66.289,45.921 ; 66.289,45.921 66.297,45.909 ; 66.289,45.921 66.297,45.909 ; 66.297,45.909 66.305,45.896 ; 66.297,45.909 66.305,45.896 ; 66.305,45.896 66.314,45.883 ; 66.305,45.896 66.314,45.883 ; 66.314,45.883 66.322,45.869 ; 66.314,45.883 66.322,45.869 ; 66.322,45.869 66.33,45.853 ; 66.322,45.869 66.33,45.853 ; 66.33,45.853 66.339,45.836 ; 66.33,45.853 66.339,45.836 ; 66.339,45.836 66.347,45.818 ; 66.339,45.836 66.347,45.818 ; 66.347,45.818 66.355,45.799 ; 66.347,45.818 66.355,45.799 ; 66.355,45.799 66.363,45.778 ; 66.355,45.799 66.363,45.778 ; 66.363,45.778 66.372,45.756 ; 66.363,45.778 66.372,45.756 ; 66.372,45.756 66.38,45.733 ; 66.372,45.756 66.38,45.733 ; 66.38,45.733 66.388,45.708 ; 66.38,45.733 66.388,45.708 ; 66.388,45.708 66.397,45.681 ; 66.388,45.708 66.397,45.681 ; 66.397,45.681 66.405,45.653 ; 66.397,45.681 66.405,45.653 ; 66.405,45.653 66.413,45.622 ; 66.405,45.653 66.413,45.622 ; 66.413,45.622 66.421,45.59 ; 66.413,45.622 66.421,45.59 ; 66.421,45.59 66.43,45.555 ; 66.421,45.59 66.43,45.555 ; 66.43,45.555 66.438,45.518 ; 66.43,45.555 66.438,45.518 ; 66.438,45.518 66.446,45.478 ; 66.438,45.518 66.446,45.478 ; 66.446,45.478 66.455,45.434 ; 66.446,45.478 66.455,45.434 ; 66.455,45.434 66.463,45.388 ; 66.455,45.434 66.463,45.388 ; 66.463,45.388 66.472,45.338 ; 66.463,45.388 66.472,45.338 ; 66.472,45.338 66.48,45.286 ; 66.472,45.338 66.48,45.286 ; 66.48,45.286 66.488,45.23 ; 66.48,45.286 66.488,45.23 ; 66.488,45.23 66.496,45.169 ; 66.488,45.23 66.496,45.169 ; 66.496,45.169 66.504,45.102 ; 66.496,45.169 66.504,45.102 ; 66.504,45.102 66.511,45.034 ; 66.504,45.102 66.511,45.034 ; 66.511,45.034 66.519,44.959 ; 66.511,45.034 66.519,44.959 ; 66.519,44.959 66.526,44.879 ; 66.519,44.959 66.526,44.879 ; 66.526,44.879 66.533,44.792 ; 66.526,44.879 66.533,44.792 ; 66.533,44.792 66.539,44.699 ; 66.533,44.792 66.539,44.699 ; 66.539,44.699 66.546,44.599 ; 66.539,44.699 66.546,44.599 ; 66.546,44.599 66.551,44.492 ; 66.546,44.599 66.551,44.492 ; 66.551,44.492 66.557,44.377 ; 66.551,44.492 66.557,44.377 ; 66.557,44.377 66.561,44.254 ; 66.557,44.377 66.561,44.254 ; 66.561,44.254 66.566,44.122 ; 66.561,44.254 66.566,44.122 ; 66.566,44.122 66.568,44.015 ; 66.566,44.122 66.568,44.015 ; 66.568,44.015 67.078,35.856 ; 66.568,44.015 67.078,35.856

## Other copper
Ground Plane (plane layer: these items are gaps in the copper):
  lines w0.254: -2.256,55.194 -2.25,55.2 -2.25,76.05 -0.675,77.625 20.25,77.625 23.25,74.625 23.25,55.194 3.044,55.194 -2.256,55.194
Power Plane (plane layer: these items are gaps in the copper):
  lines w0.254: 29.525,41.625 29.725,41.825 31.9,41.825 33.85,41.825 58.225,17.45 61.925,13.75 61.925,12.275 70.35,3.85 82.925,3.85 86.35,7.275 86.35,13.15 79.225,20.275 79.225,21.15 79.225,31.45 79.225,32.375 78.85,32.75 77.65,32.75 76.967,32.75 76.967,34.883 76.967,39.75 76.967,41.333 76.45,41.85 75.425,41.85 73.325,39.75 70.6,39.75 70.475,39.875 70.475,43.375 70.475,48.675 70.475,51.175 69.875,51.775 68.125,51.775 66.05,49.7 66.05,49.175 31.225,49.175 26.425,49.175 25.1,47.85 24.1,47.85 23.675,47.425 23.675,39.8 22.35,38.475 22.35,36.825 17.025,31.5 17.025,24.55 15.925,23.45 12.711,23.45 11.475,22.214 11.475,21.214 12.425,20.264 12.989,19.7 16.664,19.7 18.5,19.7 21.525,22.725 21.525,24.089 21.525,28.75 22.475,29.7 25.1,29.7 25.6,30.2 25.6,32.38 25.23,32.75 23.625,32.75 23.425,32.95 23.425,34.05 25.6,36.225 28.15,36.225 28.825,36.9 31.65,36.9 32,37.25 32,39.284 31.534,39.75 29.65,39.75 29.25,40.15 29.25,41.35 29.525,41.625 ; 29.525,41.625 29.525,41.625 ; -2.25,55.194 -2.25,76.05 -0.675,77.625 20.25,77.625 23.25,74.625 23.25,55.194 5.219,55.194 -2.25,55.194

## Silkscreen, mask and mechanical layers (free items; w line width, h text height)
Top Overlay:
  drawing of 11 lines, arcs and shapes, not listed
  text "2005-G" at 19.975,59.45 h2 r90
  text "Olimex interface board CdB/OS" at 35.825,46.85 h1
  text "EXP1" at 0.2,42.975 h1 r270
  text "I2C" at 95.375,40.275 h1 r90
  text "EXP1" at 13.275,31.4 h1
  text "SERIAL/SPI" at 94.025,24.675 h1 r90
  text "EXP2" at 0.2,20.7 h1 r270
  text "EXP2" at 12.875,9.275 h1
  text "+5V" at 18.2,6.2 h0.75
  text "-" at 21.125,2.9 h0.75 r180
  text "+" at 18.65,2.3 h0.75 r90
Bottom Overlay:
  text "C" at 98.756,67.514 h99.05 r90
Board Outline:
  lines w0.01: 82,55.194 82,60.85 96,60.85

## Text inside footprints (layer, text, board x,y; h text height)
D1: Top Overlay "A" at 25.314,7.275 h0.51; Top Overlay "C" at 27.164,7.275 h0.51
D2: Top Overlay "A" at 25.275,4.35 h0.51; Top Overlay "C" at 27.15,4.3 h0.51